# EAGLE board Motor Driver PCB (EAGLE 9.7.0)
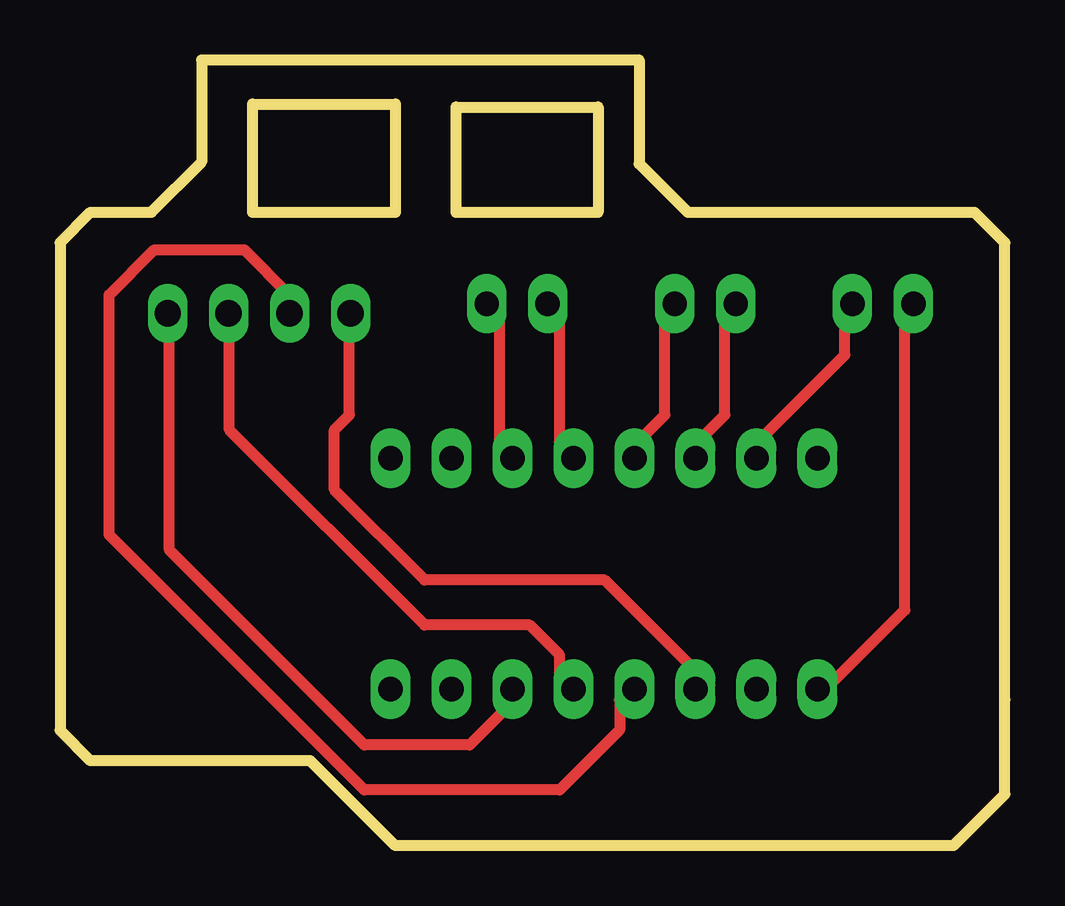
[diagram p0: board, top side]
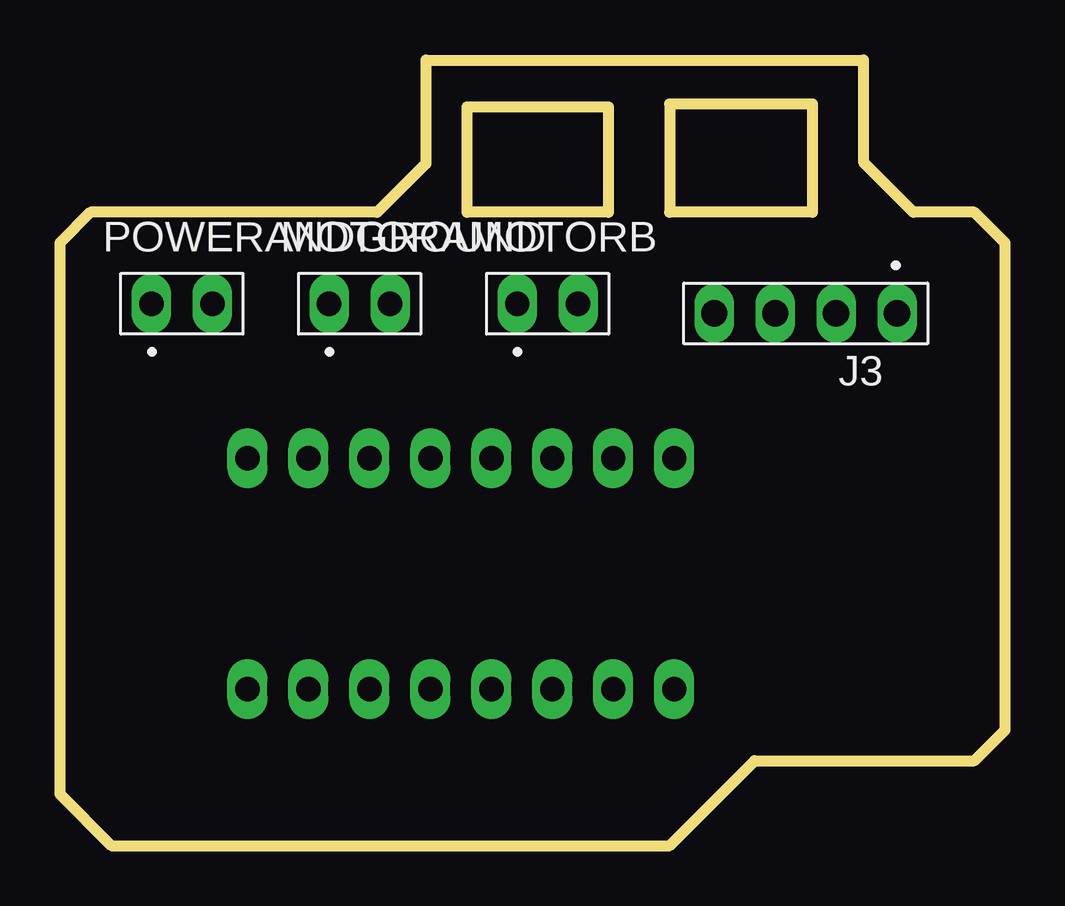
[diagram p1: board, bottom side, seen from below]

Size 39.37 x 32.76 mm. Coordinates in mm from the lower left corner, seen from the top.
Outline: 10.42,3.55 1.27,3.55 0,4.82 0,25.14 1.27,26.41 3.81,26.41 5.9,28.5 5.9,32.76 24.13,32.76 24.13,28.43 26.16,26.41 38.1,26.41 39.37,25.14 39.37,6.09 39.37,2.14 37.22,0 13.97,0 10.42,3.55
Outline: 8.02,26.41 13.97,26.41 13.97,30.92 8.02,30.92 8.02,26.41
Outline: 16.51,26.41 22.42,26.41 22.42,30.79 16.51,30.79 16.51,26.41
Copper layers (1*16): Top / Bottom
Stack-up Default Layer Stack: Top User Defined 0.035mm / Dielectric-1 User Defined 1.5mm / Bottom User Defined 0.035mm
Design rules "OthermillDRC_1_32_v2": minimum track width 8mil, minimum drill 0.8mm, track to track 0.794003125mm, track to pad 0.794003125mm, pad to pad 0.794003125mm, via to via 0.794003125mm, smd to smd 0mil, copper to edge 0mil, drill to drill 1mil, minimum pad ring 10mil, minimum via ring 10mil, stop-mask expansion 1mil, vias tented up to drill 30mil, thermal gap 10mil
Net classes: 0 default: width 0.457 mm, drill 1.524 mm, clearance 0.381 mm

## Footprints (pad centres in the part's own frame; a part is rotated, then mirrored left to right if it is on the bottom)
2X8 = drill 1.016 pad 1.676 long: 1 0,2.54; 2 0,12.16; 3 2.54,12.16; 4 2.54,2.54; 5 5.08,12.16; 6 5.08,2.54; 7 7.62,12.16; 8 7.62,2.54; 9 10.16,12.16; 10 10.16,2.54; 11 12.7,12.16; 12 12.7,2.54; 13 15.24,12.16; 14 15.24,2.54; 15 17.78,12.16; 16 17.78,2.54
61300411121 = drill 1.1 long: 1 -3.81,0; 2 -1.27,0; 3 1.27,0; 4 3.81,0
61300211121 = drill 1.016 pad 1.651 long: 1 -1.27,0; 2 1.27,0

## Placement (x,y rotation side)
J1  [2X8]  31.56,3.99 0 bottom
J3  61300411121  [61300411121]  8.3,22.19 180 bottom
MOTORA  61300211121  [61300211121]  26.89,22.6 0 bottom
MOTORB  61300211121  [61300211121]  19.05,22.6 0 bottom
POWERANDGROUND  61300211121  [61300211121]  34.29,22.6 0 bottom

## Library data of the parts
J1 = Library v4
J3 = Neslete kluibrary; CREATED_BY: PCBLayout.com; DIGI_KEY_PART_NUMBER: 732-5317-ND; MANUFACTURER: Wurth Electronics Inc.; MPN: 61300411121
MOTORA MOTORB POWERANDGROUND = Aaron Electronics Library; CREATED_BY: PCBLayout.com; DIGI_KEY_PART_NUMBER: 732-5315-ND; MANUFACTURER: Wurth Electronics Inc.; MPN: 61300211121

## Nets
7V: J1.3 POWERANDGROUND.2
GND: J1.1 POWERANDGROUND.1
N$1: J1.5 MOTORA.1
N$2: J1.7 MOTORA.2
N$3: J1.9 MOTORB.1
N$4: J1.11 MOTORB.2
N$7: J1.6 J3.4
N$8: J1.8 J3.3
N$9: J1.10 J3.2
N$10: J1.12 J3.1

## Tracks (layer width: path | path; a pad name or v marks a point on that pad's centre or on a via)
7V
  Top 0.457: POWERANDGROUND.2 32.71,22.34 32.71,20.46 28.95,16.71 J1.3
GND
  Top 0.457: POWERANDGROUND.1 35.21,22.34 35.21,9.83 32.08,6.7 J1.1
N$1
  Top 0.457: MOTORA.1 27.7,22.34 27.7,17.96 26.45,16.71 J1.5
N$2
  Top 0.457: MOTORA.2 25.2,22.34 25.2,17.96 23.95,16.71 J1.7
N$3
  Top 0.457: MOTORB.1 20.82,22.34 20.82,16.71 J1.9
N$4
  Top 0.457: MOTORB.2 18.32,22.34 18.32,16.71 J1.11
N$7
  Top 0.457: J3.4 12.06,21.71 12.06,17.96 11.43,17.33 11.43,14.83 15.19,11.08 22.7,11.08 27.07,6.7 J1.6
N$8
  Top 0.457: J3.3 9.56,22.34 9.56,22.96 7.68,24.84 3.93,24.84 2.05,22.96 2.05,12.95 12.69,2.32 20.82,2.32 23.32,4.82 23.32,6.07 J1.8
N$9
  Top 0.457: J3.2 7.06,21.71 7.06,17.33 15.19,9.2 19.57,9.2 20.82,7.95 20.82,6.7 J1.10
N$10
  Top 0.457: J3.1 4.55,21.71 4.55,12.33 12.69,4.2 17.07,4.2 18.94,6.07 J1.12